# Altium PCB roneMotorBoard-v8.PcbDoc (part 2 of 2)
Units mil, origin at the board's own origin, x right, y up, seen from the top; angles counter-clockwise.
Board outline 3702 x 3936.38 mil, 2 copper layers (Top Layer, Bottom Layer); 99 components, 86 nets, 393 pads, 263 vias.
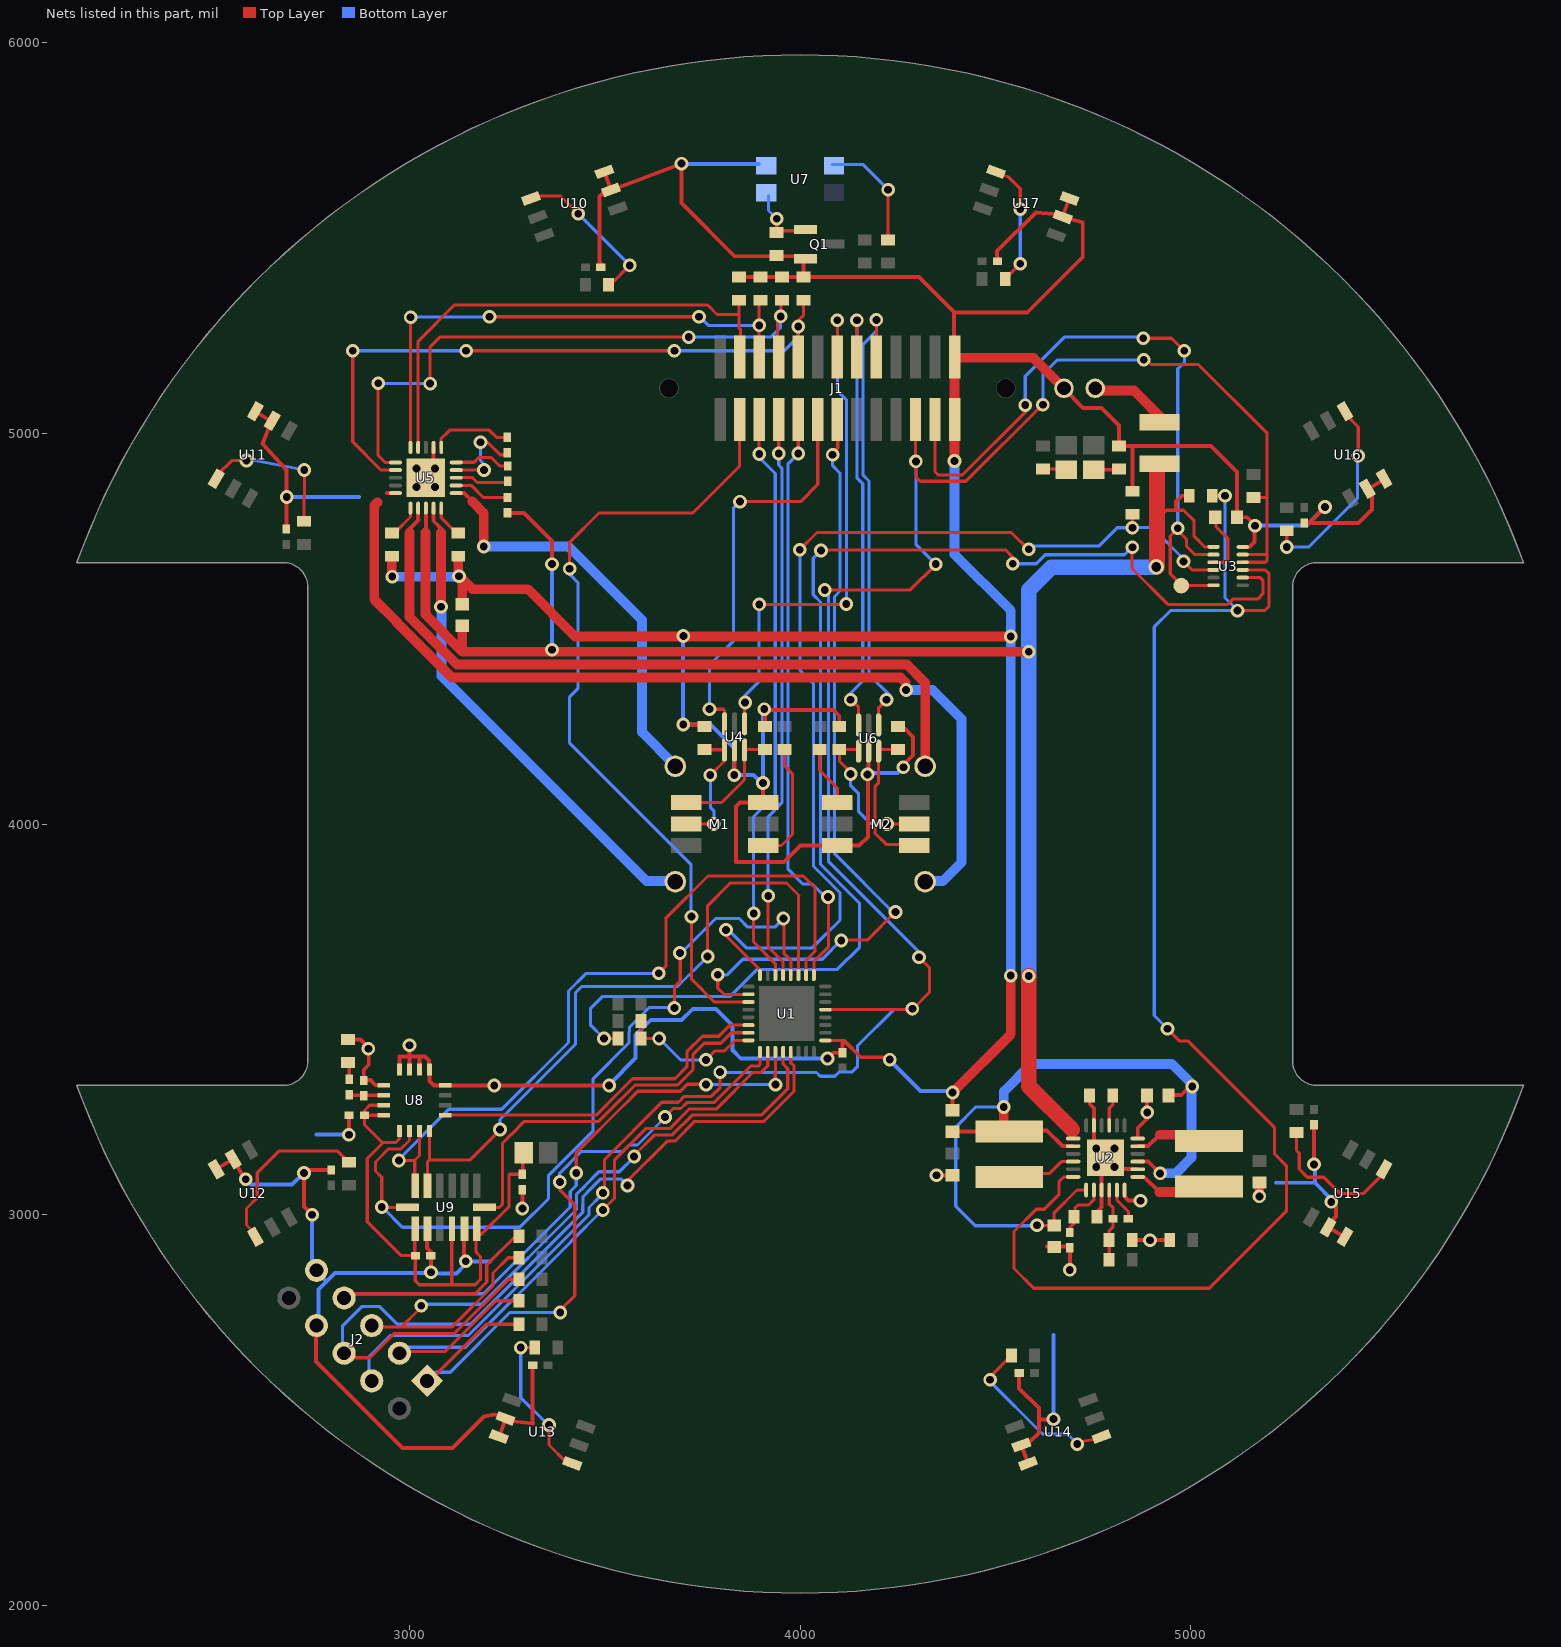
[diagram p2: the nets of this part, all layers, seen from the top]

## Via types
v1: diameter 35, hole 20, Top Layer to Bottom Layer, 230 vias
v2: diameter 89, hole 89, Top Layer to Bottom Layer, 12 vias
v3: diameter 25.98, hole 12.99, Top Layer to Bottom Layer, tented top, 9 vias
v4: diameter 35, hole 20, Top Layer to Bottom Layer, tented top, 8 vias
v5: diameter 175, hole 175, Top Layer to Bottom Layer, 2 vias
v6: diameter 915, hole 915, Top Layer to Bottom Layer, 1 vias
v7: diameter 40, hole 25, Top Layer to Bottom Layer, 1 vias

## Nets (pads, with @x,y where several pads share a name; then routed paths per layer and width w, separated by ;. In a path a pad name is that pad's centre, name@x,y a point inside that pad or via, vN(x,y) a via of type N, cw(c..) or ccw(c..) an arc to the next point about the centre after c; other vN are vias at no path point) (continued)
GND: C1.1 C2.1 C3.1 C4.1 C5.2 C6.2 C7.1 C9.2 C13.1 C14.2 C16.1 C17.1 C18.1 C19.1 C20.1 C21.1 C22.1 C23.1 C24.1 C25.1 C26.1 J1.25 J1.26 J2.8 J2.9 J3.2 M1.K M2.K Q1.2 R10.1 R11.2 R13.1 R16.2 R17.1 R19.1 R20.2 R22.1 R23.1 R24.2 R25.2 R26.2 R27.2 R28.2 R29.2 R31.1 R34.2 R35.1 U1.1 U2.3 U2.6 U2.8 U2.12 U2.17 U2.25 U3.12 U4.2 U5.2 U5.21 U6.2 U7.4 U8.8 U8.9 U8.10 U8.11 U8.12 U8.13 U9.2 U9.5 U10.5 U10.6 U11.5 U11.6 U12.5 U12.6 U13.5 U13.6 U14.5 U14.6 U15.5 U15.6 U16.5 U16.6 U17.5 U17.6 | length 17520.6
  Top Layer w8: U1.1@4067.94,3446 4107,3446
  Top Layer w10: U12.6@2505.7,3116.6 2548.38,3142.62 U12.5@2549,3143 ; U12.5@2549,3141.6 2576,3096 v1(2581,3091) ; U11.6@2606,5055 U11.5@2647.91,5030.05 ; U11.5@2643.91,5023.05 2644,5023 2624,4973 2685,4906 v1@2685,4836 ; C20.1@2685,4754.69 v1@2685,4836 ; v1(2686,4837) v1@2685,4836 ; v1(2751,3000) 2730,3021 v1(2730,3107) 2738,3115 C21.1@2800,3115 ; J2.8@2767.16,2691.42 2761,2685.26 2761,2624 2982,2403 3110,2403 3191,2484 3217,2489 U13.5@3243,2483 ; R35.1@2843,3448.53 2874.47,3448.53 2885,3438 v1@2885,3425 ; v1@2845,3214 C17.1@2845,3256 ; C14.2@2883,3343.69 2883,3371 2896,3384 v1@2896,3423 ; C14.2@2883,3345 2900,3345 2913.61,3331.39 U8.13@2934.26,3331.39 ; v1@2883,3423 v1@2885,3425 ; v1(2895,3425) v1@2885,3425 ; U8.12@2974.61,3371.74 2974.61,3405 3000.2,3405 ; U8.11@3000.2,3371.74 3000.2,3405 ; v1@3000.2,3425.2 3000.2,3405 ; U8.10@3025.8,3371.74 3025.8,3404.2 ; U9.2@3045.18,2953.94 3045.18,2914.82 3055,2905 v1(3055,2853) v1@3055,2850 ; U8.9@3050,3370 3050,3395 3040,3405 3000.2,3405 ; U8.9@3051.39,3371.74 3051.39,3342.61 3063,3331 ; U5.21@3062,4906 U5.2@3062,4964.07 ; 3064,3332 3063,3331 ; U8.8@3089,3331 3063,3331 ; U8.8@3091.35,3331 v1(3217,3331) 3400,3331 ; v1@3139.67,2885.33 v1(3144,2881) v1@3145,2880 ; v1@3140,2886 U9.5@3140,2954.61 ; U13.6@3231,2434 U13.5@3246.03,2479.2 ; U13.5@3251,2473 3316,2466 ; v1(3289,3016) C16.1@3289,3064.32 ; C22.1@3315.32,2615 3315.32,2467.68 3316,2467 ; 3401,3331 3400,3331 ; C19.1@3496,5423 3496,5428 3486,5438 3486,5606 3502.2,5622.2 U10.5@3515.97,5622.2 ; U10.6@3498.87,5669.19 U10.5@3516,5623 ; v1@3504,3331 3400,3331 ; U10.5@3526,5626 v1(3696,5690) 3696,5589 3832,5453 R34.2@3940,5453 ; v1(3700.47,4254.53) R22.1@3755,4254.53 ; v1@3832,4127 U4.2@3832,4189.54 ; R25.2@3843.53,5399.53 R26.2@3898,5399.53 R27.2@3953,5399.53 R24.2@4008,5399.53 Q1.2@4008,5441 ; M1.K@3905,4055 M1.K@3905,4055.12 ; v1(3905,4105) M1.K@3905,4055.12 ; M1.K@3905.16,4055.12 M1.K@3905,4055.12 ; R20.2@3910,4250 v1@3910,4290 ; v1@3913.5,4292 4085,4292 4100,4277 R31.1@4100,4249.53 ; R34.2@3939,5454.47 3940.47,5453 3987,5453 Q1.2@3996,5444 ; R24.2@4008,5399.53 4107.63,5399.5 ; v1(4070,3400) 4084.68,3414.68 C1.1@4108,3414.68 4108,3444 ; M2.K@4094.84,3944.88 4150.88,3944.88 4173,3967 4173,4122 4165,4130 4175,4140 U6.2@4175,4186.54 ; M2.K@4096,3945 4000.87,3945 3958.87,3903 3836,3903 3836,4045 3846.12,4055.12 M1.K@3905,4055.12 ; 4107,3445 4108,3444 ; 4107.66,5399.53 4304.47,5399.53 4394,5310 4394,5309 ; 4155,3403 4113,3445 4108,3445 4108,3444 ; 4156,3403 v1@4229,3403 ; R23.1@4248,4247 4265,4247 4289,4223 4289,4176 v1@4262,4149 ; v1@4347,3101 4390,3101 C3.1@4390,3101.44 ; C2.1@4390,3267.56 v1(4390,3313) ; 4393,5309 4394,5309 ; J1.26@4394,5235 4394,5309 ; C26.1@4504.69,5440 4504,5466 4603,5565 U17.5@4663,5560 ; C23.1@4560.31,2595 4560.31,2555.68 4611,2505 4611,2476 ; U14.5@4566.03,2410.8 4580.47,2371.44 4581,2370 U14.6@4580,2368 ; U14.5@4573,2417 4586,2417 4611,2442 4611,2476 ; 4630.84,2918.44 C4.1@4690,2918.44 ; v1(4648,2477) 4647,2476 4611,2476 ; J3.2@4675,5114 4724,5065 4771,5065 4816,5020 R17.1@4816,4967.53 5051.47,4967.53 5118,4901 C9.2@5118,4785 ; U17.6@4687,5599 U17.5@4671.97,5553.8 4723,5539 4723,5451 4581,5309 4394,5309 ; v1@4690,2862 C4.1@4690,2917.6 ; R11.2@4741,3292 4741,3283 4751.47,3272.53 U2.17@4751.47,3228.68 ; U2.17@4751.47,3228.83 4751.47,3175.69 U2.25@4781,3146.16 ; R10.1@4759,3007 4771.16,3019.16 U2.3@4771.16,3063.32 ; U2.3@4771.16,3063.48 4771.16,3136.32 U2.25@4781,3146.16 ; U2.25@4810.53,3107.47 U2.25@4810.53,3116.63 ; U2.6@4830.21,3046.79 4840.21,3036.79 v1@4871,3036.79 ; R16.2@4849.53,2935 4889,2935 v1(4895,2935) R13.1@4945.47,2935 ; R19.1@4850,4849 4850,4967 ; U2.8@4863.68,3116.63 U2.25@4810.53,3116.63 ; U2.12@4863.68,3195.37 4863.68,3221.68 4888,3246 v1@4884,3250 ; v1@4887.44,3261.56 C5.2@4887.44,3315 ; C9.2@5117.56,4785 C9.2@5118,4785 ; C9.2@5118,4780.44 C9.2@5122.56,4785 ; U3.12@5132.4,4709.21 5150.17,4709.21 5163,4722.04 5163,4754 v1@5168,4759 ; v1@5165,4763 5143,4785 C9.2@5122.56,4785 ; C25.1@5289,4771 5303,4771 v1(5343,4811) ; C25.1@5290,4770.31 5428.31,4770.31 5463,4805 5463,4847 U16.5@5460,4850 ; v1(5315,3129) C24.1@5315,3230.32 ; U15.5@5351,2968.4 U15.6@5394,2943 ; U15.5@5358,2983 5371,2996 5371,3021 v1@5362.5,3029.5 ; v1(5359,3033) v1@5362.5,3029.5 ; v1@5362,3029 v1@5362.5,3029.5 ; v1@5363,3030 v1@5362.5,3029.5 ; U16.5@5454,4858 U16.6@5493,4881 ; U2.25@4781,3146.16 U2.25@4810.53,3116.63 ; C9.2@5118,4785 C9.2@5122.56,4785
  Top Layer w25: v1@2955,4634 R28.2@2955,4685.47 ; v1@3125,4637 R29.2@3125,4685.47 ; v1@3127.5,4634.5 3161,4601 3303,4601 3424,4480 v1(4539,4480) ; C13.1@3135,4562.56 v1@3135,4625 ; v1(4390,3313) 4539,3462 v1(4539,3612) ; v1(4395,4929) J1.25@4395,5034.98 J1.26@4395,5195.02 ; J1.26@4397,5193 4597,5193 J3.2@4675,5115 ; v1(5175,3047) C7.1@5175,3082.44
  Bottom Layer w10: v1(2581,3091) 2595,3077 2700,3077 v1(2730,3107) ; v1(2686,4837) 2871,4837 ; v1(2751,3000) 2751,2866 2785,2832 ; 2762,3205 2836,3205 v1@2845,3214 ; J2.8@2767.16,2718 2767.16,2809.16 2809,2851 v1@3057,2851 ; v1@3055,2850 3120,2850 3139,2869 v1@3139,2875 ; v1@3135,2875 v1@3139,2875 ; v1@3141,2880 v1@3145,2880 ; v1@3143,2879 v1@3139,2875 ; 3206,2880 v1@3145,2880 ; v1@3513,3332 3513,3335 3579,3401 3579,3460.04 3617.46,3498.5 3663.63,3498.5 3664.13,3499 3664.87,3499 3665.37,3498.5 3696.5,3498.5 3725,3527 3784,3527 3827,3484 3827,3420 ; v1@3698,5689 U7.4@3894,5689 ; v1@3700.47,4480.47 v1(3700.47,4254.53) 3770.47,4254.53 3830,4195 3830,4130 3825,4125 v1(3831,4125) 3880,4125 v1@3902.5,4102.5 ; 3827.87,3420 3847.87,3400 v1(4070,3400) ; v1(3905,4105) v1@3905,4287 ; v1@4164,4130 4219,4130 ; 4221,4130 4249,4130 v1(4264,4145) ; v1@4231,3394 4308,3317 v1@4381,3317 ; v1(4648,2477) 4648,2692 ; v1@5163,4764 5296,4764 v1(5343,4811) ; 5217,3082 5317,3082 ; v1@5317,3128 5317,3082 ; v1@5362.5,3036.5 5317,3082 ; v1@3139,2875 3140,2875 v1@3145,2880
  Bottom Layer w25: v1(2956,4633) v1@3127,4633 ; v1(4395,4929) 4395,4690 4539,4546 v1(4539,4480) v1(4539,3612)
  other v1: 4690,2859 4871,3036 4349,3101 2845,3205 4888,3262 3511,3331 4229,3397 3000,3434 4172,4127 3908,4294 3701,4481 3127,4634 5164,4763
  other v4: 4757.38,3122.38 4804.62,3122.38 4757.38,3169.62 4804.62,3169.62 3018.38,4862.38 3065.62,4862.38 3018.38,4909.62 3065.62,4909.62
JTAG_BOTTOM_TCK: J2.1 R8.1 U1.25 | length 1812.8
  Top Layer w8: J2.1@3042,2565 3197,2720 R8.1@3280.47,2720 ; v1@3385,3085 v1(3385,3084) 3385,3064 3423,3026 3423,2793 3388,2758 v1@3397,2749 ; v1@3653,3250 3653.12,3250 3675.12,3272 3695.09,3272 3710.09,3287 3779.37,3287 3872.75,3380.37 3893.37,3380.37 3897.1,3384.1 U1.25@3897.1,3416.57
  Bottom Layer w8: J2.1@3039,2567 J2.1@3074,2567 ; J2.1@3047,2576 3068,2597 3104,2597 3257,2750 v1(3386,2750) 3389,2750 3390,2749 v1@3397,2749 ; v1@3384.5,3085.5 3384.5,3106.5 3440,3162 3546.28,3162 3562.78,3178.5 3583.5,3178.5 3654,3249 v1(3654,3250)
JTAG_BOTTOM_TDI: J2.7 R6.1 U1.27 | length 2046.4
  Top Layer w8: J2.7@2831,2778 2851,2798 3168,2798 3198,2828 3198,2872 R6.1@3273,2947 ; v1@3434,3110 3427,3117 3427,3159 3547.75,3279.75 3548.01,3279.75 3584.25,3316 3692.88,3316 3710.88,3334 3758,3334 v1(3759,3333) ; v1@3936.07,3322 U1.27@3936.47,3416.57
  Bottom Layer w8: J2.7@2826,2774 2850,2798 3189.49,2798 3411.5,3020.01 3411.5,3059.5 3427,3075 3427,3093 3421,3099 v1@3425,3099 ; v1(3759,3333) v1(3937,3333)
  other v1: 3427,3107
JTAG_BOTTOM_TDO: J2.5 R5.1 U1.28 | length 1843.9
  Top Layer w8: J2.5@2905,2713 3109.25,2713 3214,2817.75 3214,2851 3253,2890 R5.1@3280.47,2890 ; 2980.5,2713.5 3022,2755 3022,2774 v1@3034,2774 ; v1@3574.5,3151.5 3627.5,3204.5 3672.85,3204.5 3723.35,3255 3900.72,3255 3968,3322.28 3968,3374 3956.16,3385.84 U1.28@3956.16,3416.57
  Bottom Layer w8: v1@3034,2774 3037,2771 3185.12,2771 3427.5,3013.38 3427.5,3052.5 3449.5,3074.5 3449.5,3074.85 3484.65,3110 3537,3110 3575,3148 v1(3575,3149)
  other v1: 3030,2767
JTAG_BOTTOM_TEST: J2.6 R7.1 U1.29 | length 2206.9
  Top Layer w8: J2.6@2829,2634 2899,2634 2961,2696 2973,2696 ; 2970,2696 3114.88,2696 3253.88,2835 R7.1@3280.47,2835 ; v1(3558,3075) 3558,3087 3659.5,3188.5 3679.47,3188.5 3729.97,3239 3907.35,3239 3984,3315.65 3984,3381 3975.84,3389.16 U1.29@3975.84,3416.57
  Bottom Layer w8: J2.6@2829,2636 2829,2716 2878,2765 2924,2765 2969,2720 3156.75,2720 3443.5,3006.75 3443.5,3025.13 3444,3025.63 3444,3046.37 3465.5,3067.87 3465.5,3068.22 3489.28,3092 3541,3092 v1(3558,3075)
JTAG_BOTTOM_TMS: J2.3 R4.1 U1.26 | length 1699.8
  Top Layer w8: J2.3@2985,2648 2987,2650 3091.51,2650 3221.51,2780 R4.1@3280.47,2780 ; v1@3499.5,3011.5 3499.5,3017.5 3525,3043 3525,3140.72 3604.78,3220.5 3666.22,3220.5 3716.72,3271 3786,3271 3879.37,3364.37 3900,3364.37 3916.79,3381.16 U1.26@3916.79,3416.57
  Bottom Layer w8: J2.3@2969,2632 2998,2661 3143,2661 3412,2930 ; 3413,2931 v1@3495.5,3013.5
  other v1: 3495,3012
LED_IR_BEACON: J1.13 U1.18 | length 1957.7
  Top Layer w8: v1@3789,3613 3789,3580 3805,3564 U1.18@3859.79,3564 ; v1@4082,4948 4096,4962 J1.13@4096,5020 ; v1(4083,4945) v1@4084,4946 ; v1@4108.5,3703.5 4172.5,3703.5 v1(4244,3775)
  Bottom Layer w8: v1@3788,3614 v1(3789,3614) 3813,3614 3853,3654 ; 3855,3654 4056,3654 v1@4105,3703 ; v1(4083,4945) 4083,4917 4102,4898 4102,4596.28 4088,4582.28 4088,3924 v1@4241,3771
  other v1: 4105,3702
MOT0_CUR: R29.1 U5.15 | length 77.7
  Top Layer w8: U5.15@3081.37,4808.24 3081.37,4783.37 R29.1@3118.74,4746
MOT0_PWMA: J1.4 R25.1 U5.4 | length 1268
  Top Layer w8: U5.4@3022.32,4963.76 3022.32,5235.31 3115,5328 3763,5328 3787,5304 3843,5304 ; R25.1@3840,5338 3843,5335 3843,5304 ; J1.4@3842,5202.26 ccw(c3852.24,5202.26) J1.4@3845,5195.02 ; J1.4@3847,5243 3847,5266 3843,5270 3843,5304 ; J1.4@3843,5199.85 ccw(c3849.83,5199.85) J1.4@3845,5195.02 ; J1.4@3843,5199.85 ccw(c3849.83,5199.85) J1.4@3845,5195.02 ; J1.4@3843,5199.85 ccw(c3849.83,5199.85) J1.4@3845,5195.02 ; J1.4@3843,5199.85 ccw(c3849.83,5199.85) J1.4@3845,5195.02
MOT0_PWMB: J1.6 R26.1 U5.5 | length 1381.2
  Top Layer w8: U5.5@3002.63,4963.76 3002.63,5022.37 ; 3003,5022 3003,5218 v1(3003,5297) ; v1(3205,5298) v1(3741,5298) ; J1.6@3895,5195.02 v1(3895,5276) R26.1@3895,5339
  Bottom Layer w8: v1(3003,5297) 3204,5297 v1(3205,5298) ; v1(3741,5298) 3743,5298 3765,5276 v1(3895,5276) v1@3893.5,5274.5
MOT1_A: M2.M2 U5.10 | length 2371.7
  Top Layer w10: 2941.94,4846.94 U5.10@2963.56,4846.94
  Top Layer w20: v1@4270,4343 v1(4271,4343)
  Top Layer w25: 2918.5,4823.5 2910,4815 2910,4575 2967,4518 ; 2967,4516.33 3108.33,4375 4257,4375 4270,4362
  Bottom Layer w25: v1(4271,4343) 4339,4343 4413,4269 4413,3902 4365,3854 M2.M2@4323,3854
MOT1_B: M2.M1 U5.12 | length 1884.7
  Top Layer w10: 3001,4746 3001,4756 3022.97,4777.98 ; 3022,4778 U5.12@3022,4807.24
  Top Layer w25: 3001,4746 3000,4745 3000,4530 3122,4408 4273,4408 4320,4361 M2.M1@4320,4153
MOT1_CUR: R28.1 U5.11 | length 78.8
  Top Layer w8: R28.1@2965.03,4745 2965.03,4748.03 3002.63,4785.63 U5.11@3002.63,4808.24
MOT1_PWMA: J1.8 R27.1 U5.6 | length 1552.5
  Top Layer w8: v1(2920,5128) 2920,4943 2937.63,4925.37 U5.6@2964.24,4925.37 ; v1(3053,5127) 3053,5221 3078,5246 v1(3715,5246) ; v1@3942,5289 3942,5198.02 ccw(c3945,5198.02) J1.8@3945,5195.02 cw(c3945,5197.02) J1.8@3943,5197.02 ; v1(3950,5299) 3951,5298 R27.1@3951,5341
  Bottom Layer w8: v1@2920,5127 v1(3053,5127) ; v1(3715,5246) 3925,5246 3950,5271 v1(3950,5299)
MOT1_PWMB: J1.10 R24.1 U5.7 | length 1681.7
  Top Layer w8: v1@2855,5208 2855,4978 2927.32,4905.69 U5.7@2964.24,4905.69 ; v1(3145,5211) v1(3678,5211) ; J1.10@3995,5195.02 v1@3995,5263 ; v1(3995,5273) v1@4005,5273 ; 3998,5291 4008,5301 R24.1@4008,5340.47
  Bottom Layer w8: v1(2855,5211) v1(3145,5211) ; v1(3678,5211) 3959,5211 3995,5247 v1(3995,5273)
MOT_0A: M1.M2 U5.16 | length 1068.5
  Top Layer w10: U5.16@3119.07,4846.94 3140.06,4846.94 3161,4826
  Top Layer w25: 3161,4826 3161,4825 3190,4796 v1(3190,4710)
  Bottom Layer w25: v1(3190,4710) 3406.74,4710 3595,4521.74 3595,4235 M1.M2@3680,4150
MOT_0B: M1.M1 U5.14 | length 1247.3
  Top Layer w10: 3061,4776 3081,4756 ; 3062,4776 U5.14@3062,4808.56
  Top Layer w25: v1(3081,4556) 3081,4746
  Bottom Layer w25: v1@3082,4557 3082,4379 3607,3854 M1.M1@3683,3854
NetC4_2: C4.2 R10.2 U2.2 | length 143.4
  Top Layer w8: C4.2@4690,2954.69 4690,2967 4700,2977 R10.2@4700,2994 ; R10.2@4700.47,2995 R10.2@4701.17,2995 ; R10.2@4703,3000 4703,3017 4711,3025 4738,3025 4751.47,3038.47 U2.2@4751.47,3063.32
NetC8_1: C8.1 R14.2 R16.1 U2.4 | length 205.2
  Top Layer w8: R16.1@4790,2941 4790,2958 4800,2968 4800,3019 4791,3027 U2.4@4791,3056 ; U2.4@4790.84,3063.48 4791,3063.32 U2.4@4791,3048.99 ; R14.2@4791,2871 4791,2937 R16.1@4792,2938
NetC8_2: C8.2 U2.5 | length 80.5
  Top Layer w8: U2.5@4810.53,3063.32 4810.53,3037.47 4840,3008 C8.2@4840,2995
NetC9_1: C9.1 U3.3 | length 160.3
  Top Layer w8: U3.3@5057.6,4669.84 5086.84,4669.84 5095,4678 5095,4730 5064,4761 5064,4779 C9.1@5068,4783
NetC10_1: C10.1 U5.19 | length 230.2
  Top Layer w8: U5.19@3119.07,4906 v1(3191,4906) ; v1(3182,4977) 3201,4976 3232,4945 3251.69,4945 C10.1@3253,4946.31
  Bottom Layer w8: v1@3184,4913 v1(3191,4906) ; v1@3184,4975 v1(3182,4977) 3182,4930 v1@3192,4920
NetC10_2: C10.2 U5.1 | length 211.4
  Top Layer w8: U5.1@3080.68,4964.07 3080.68,4985.68 3103,5008 3204.25,5008 3223.25,4989 3248.69,4989 C10.2@3252,4985.69
NetC11_1: C11.1 U5.18 | length 138.2
  Top Layer w8: U5.18@3119.07,4886.31 3161.31,4886.31 3173.63,4874 3248.06,4874 C11.1@3251,4876.94
NetC11_2: C11.2 U5.20 | length 146.3
  Top Layer w8: U5.20@3119.07,4925.68 3165.43,4925.68 3177.75,4938 3209,4938 3230.69,4916.31 C11.2@3251.31,4916.31
NetC12_2: C12.2 U5.17 | length 144.7
  Top Layer w8: U5.17@3119.07,4866.63 3158.37,4866.63 3189.31,4835.69 C12.2@3251,4835.69
NetC15_2: C15.2 R35.2 | length 42.3
  Top Layer w8: C15.2@2846,3346.69 R35.2@2846,3389
NetD1_2: D1.2 R12.2 | length 50.5
  Top Layer w8: R12.2@4621,4908.47 D1.2@4671.53,4908.47
NetD2_2: D2.2 R17.2 | length 60.5
  Top Layer w8: D2.2@4751,4906.5 R17.2@4811.5,4906.5
NetJ3_1: J3.1 R9.2 | length 197.5
  Top Layer w25: J3.1@4771,5109 4854.15,5109 R9.2@4935,5028.15
NetL1_1: L1.1 U2.22 | length 188
  Top Layer w8: L1.1@4521,3097.75 4529.25,3106 4638.37,3106 4668.37,3136 U2.22@4693.11,3136
NetL2_1: L2.1 U2.7 | length 211.7
  Top Layer w10: U2.7@4863.68,3096.94 4880.06,3096.94 4919,3058 ; L2.1@5031.09,3058 L2.1@5051,3077.91
  Top Layer w25: 4919,3058 L2.1@5031.09,3058
NetL2_2: L2.2 U2.11 | length 158.2
  Top Layer w10: U2.11@4863.68,3175.53 4890,3175.53 ; 4890,3176 4920.91,3205 ; L2.2@5039.41,3206 L2.2@5051,3194.41
  Top Layer w25: 4920.91,3205 L2.2@4994,3205
NetM1_A: M1.A R21.1 | length 311.4
  Top Layer w8: M1.A@3906,3945 3952,3945 3980,3973 3980,4129 3960,4149 R21.1@3960,4190.47
NetM2_A: M2.A R30.1 | length 155.1
  Top Layer w8: R30.1@4050,4190.47 4050,4137 4095,4092 M2.A@4095,4054
NetQ1_1: Q1.1 R34.1 U7.3 | length 179.7
  Top Layer w8: R34.1@3940,5512 v1(3940,5549) ; R34.1@3940,5518 4010.17,5518 Q1.1@4013.57,5521.4
  Bottom Layer w8: U7.3@3919,5608 3919,5570 v1(3940,5549)
NetR2_2: R2.2 R3.2 U1.24 | length 358.3
  Top Layer w8: R3.2@3592.53,3451.47 R2.2@3592.53,3496 ; R3.2@3597,3451 v1(3639,3451) ; v1(3759,3396.36) 3782,3419.36 3806.36,3419.36 3833.1,3446.1 U1.24@3867.57,3446.1
  Bottom Layer w8: v1(3639,3451) 3693.64,3396.36 v1(3759,3396.36)
NetR11_1: R11.1 U2.15 | length 83.8
  Top Layer w8: U2.15@4790.84,3228.83 4790.84,3265.84 4790.84,3272.84 4800,3282 4800,3306 R11.1@4802,3308
NetR32_2: R32.2 U7.1 | length 299.4
  Top Layer w8: R32.2@4225,5494.53 v1(4225,5623)
  Bottom Layer w8: U7.1@4081,5688 4160,5688 v1(4225,5623)
NetR36_1: R36.1 U10.1 | length 392.3
  Top Layer w8: U10.1@3323,5607 3386.47,5607 v1(3432,5561.47) v1@3426.47,5567 ; R36.1@3514.53,5380 v1(3564,5429.47)
  Bottom Layer w8: v1(3432,5561.47) v1(3564,5429.47)
NetR37_1: R37.1 U11.1 | length 378.9
  Top Layer w8: U11.1@2511,4896 2545,4930 v1(2583,4930) ; R37.1@2726.03,4778.5 R37.1@2730,4774.53 v1(2731,4906)
  Bottom Layer w8: v1@2580,4935 2579,4935 2579.96,4934.82 2583.78,4934.09 v1(2731,4906)
NetR38_1: R38.1 U12.1 | length 443.9
  Top Layer w8: U12.1@2604,2953 2583,2974 2583,3016 2610.5,3043.5 2610.5,3107.5 2666,3163 2816.53,3163 R38.1@2845,3134.53
NetR39_1: R39.1 U13.1 | length 397.6
  Top Layer w8: v1(3285,2660) 3320,2660 R39.1@3325,2660 ; v1(3357,2462) 3357,2411 3401,2367 U13.1@3417,2367
  Bottom Layer w8: v1(3285,2660) 3285,2532 v1@3356,2461
NetR40_1: R40.1 U14.1 | length 436.9
  Top Layer w8: v1(4486,2578) 4486,2585.53 R40.1@4540.47,2640 ; v1@4711,2418 U14.1@4770,2427
  Bottom Layer w8: v1@4484,2574 4485,2574 4620,2439 4684,2439 v1@4710,2413
  other v1: 4709,2413
NetR41_1: R41.1 U15.1 | length 371.8
  Top Layer w8: R41.1@5278,3202.47 R41.1@5270,3210.47 5270,3164 5277,3157 5277,3117 5298,3096 5340,3096 5382,3054 5441,3054 5487,3100 U15.1@5487,3109
NetR42_1: R42.1 U16.1 | length 500.8
  Top Layer w8: v1@5245,4710 R42.1@5245,4750.47 ; U16.1@5397,5047 5428,5016 v1(5428,4942)
  Bottom Layer w8: v1(5245,4709) 5301.47,4709 5426,4833.53 5426,4942 v1@5427,4943
NetR43_1: R43.1 U17.1 | length 308
  Top Layer w8: U17.1@4503,5668 4534,5655 4563,5626 v1(4563,5573) ; R43.1@4524.53,5395 v1(4563,5433.47)
  Bottom Layer w8: v1@4563,5447 v1(4563,5573)
PB_OUT: R3.1 U3.8 | length 3328.6
  Top Layer w8: v1(3498,3451) R3.1@3533.47,3451 ; v1@4054.5,4701.5 4525.5,4701.5 v1@4544,4683 ; v1(4850,4708) 4845,4708 4840,4703 4849,4694 4849,4654 4941,4562 5093.28,4562 5106.78,4575.5 5170.5,4575.5 5184,4589 5184,4624 5177.53,4630.47 U3.8@5132.4,4630.47
  Bottom Layer w8: v1(3498,3451) 3463,3486 3463,3527 3495,3559 3821,3559 3890,3628 4095,3628 4152,3685 4152,3796.63 4052,3896.63 4052,4568.28 4033.5,4586.78 4033.5,4680.5 v1(4053,4700) ; v1(4544,4666) 4604,4666 4627,4689 4830,4689 v1@4849,4708 ; v1@4846,4703 4840,4703 4845,4708 v1(4850,4708)
PLLFILT: C14.1 C15.1 U8.14 | length 88.3
  Top Layer w8: C15.1@2846,3305.8 U8.14@2934.26,3305.8
POWER_BUTTON: J1.23 TP1.1 U3.2 U3.6 | length 1753.7
  Top Layer w8: J1.23@4345,5034.98 4345,4901 4353,4893 4415,4893 4576,5054 ; v1@4887,5243 4950,5243 4982,5211 v1(4983,5211) ; v1@4965,4755 4947,4737 4947,4640 4975,4612 TP1.1@4975,4610 ; v1@4972,4745.22 4988.5,4728.72 4988.5,4710.5 5009.47,4689.53 U3.2@5057.6,4689.53 ; TP1.1@4993.21,4610.79 U3.6@5057.6,4610.79
  Bottom Layer w8: v1(4576,5072) 4576,5146 4676,5246 v1@4862,5246 ; v1(4966,4757) 4966,5166 ; 4968,5166 4983,5181 v1(4983,5211)
  other v1: 4878,5243
POWER_EN: R15.1 U2.24 U3.9 | length 3574.8
  Top Layer w8: U2.24@4698.32,3096.79 4674.47,3096.79 4662,3084.31 4662,3051.37 4624.63,3014 4603.63,3014 4547,2957.37 4547,2862.63 4597.63,2812 5047,2812 5102,2867 ; v1@4939,3476 4970,3445 4991.37,3445 5214,3222.37 5214,3155.37 5244,3125.37 5244,3008.96 5102.04,2867 ; R15.1@5059.53,4840 v1(5087,4840) ; v1(5119,4546) 5188,4546 5200,4558 5200,4640 5189.84,4650.16 U3.9@5132.4,4650.16
  Bottom Layer w8: v1(4940,3476) 4906,3510 4906,4504.37 4947.63,4546 v1(5119,4546) ; v1(5087,4840) 5087,4579 v1@5119,4547
PS_HOLD: R19.2 U1.16 U3.4 | length 2673.7
  Top Layer w8: v1@3809,3715 U1.16@3897.1,3626.9 ; U1.16@3897.1,3613.43 U1.16@3897.1,3626 ; v1(3999,4702) 4043,4746 4540,4746 v1@4582,4704 ; v1@4580,4702 4581,4703 v1@4584,4700 ; v1@4850,4745 R19.2@4850,4792.47 ; v1@4981.28,4672 5003.28,4650 U3.4@5052,4650
  Bottom Layer w8: v1@3813,3732 3862,3683 4031,3683 4102,3754 4102,3824 4034,3892 4034,4359 ; v1(3999,4702) 3999,4394 4033,4360 ; v1(4585,4703) 4585,4701 4586,4700 4597,4711 4764,4711 4811,4758 4849,4758 4849,4759 4900,4759 v1@4981,4678
  other v1: 3810,3729 4981,4672 4850,4758
QEI_0A: J1.11 U4.6 | length 1017.5
  Top Layer w8: v1@3769.59,4293.59 3803.37,4293.59 3806.41,4290.55 U4.6@3806.41,4256.46 ; v1(3846,4825) 4001,4825 4045,4869 J1.11@4045,5034.98
  Bottom Layer w8: v1@3770,4296 3768,4298 3768,4407 3829,4468 3829,4808 v1(3846,4825)
  other v1: 3768,4294
QEI_0A_ANALOG: M1.E1 R22.2 U4.1 | length 335.7
  Top Layer w8: M1.E1@3708.31,4000 v1(3779,4000) ; R22.2@3755,4195 3760,4190 3805,4190 3805,4160 v1(3770,4125)
  Bottom Layer w8: v1@3770,4009 v1(3779,4000) ; v1(3770,4125) 3770,4043 3779,4034 v1@3779,4008
QEI_0B: J1.14 U4.4 | length 1414.3
  Top Layer w8: U4.4@3857.59,4256.46 v1@3857.59,4323.41 ; v1(3895,4562) v1@4129,4562 ; J1.14@4095,5195.02 v1(4095,5289)
  Bottom Layer w8: v1@3858,4310 3858,4328 3895,4365 3895,4499 ; v1(3859,4311) v1@3859,4321 ; 3895,4500 3895,4499 ; v1(3895,4562) 3895,4499 ; v1(4095,5289) 4095,5109 4118,5086 4118,4573 v1@4129,4562
  other v1: 4118,4563
QEI_0B_ANALOG: M1.E2 R20.1 U4.3 | length 293
  Top Layer w8: M1.E2@3710,4055 3799,4055 3857.59,4113.59 U4.3@3857.59,4189.54 ; 3865,4190 3865.47,4190.47 R20.1@3910,4190.47
QEI_1A: J1.16 U6.6 | length 1164.7
  Top Layer w8: v1(4129,4318) 4129,4319 4149.41,4298.59 U6.6@4149.41,4253.46 ; J1.16@4145,5195.02 v1(4145,5289)
  Bottom Layer w8: v1(4129,4318) 4129,4319 4121,4327 4160,4366 4160,4870 ; v1(4145,5289) 4145,4886 4160,4871
QEI_1A_ANALOG: M2.E1 R31.2 U6.1 | length 374.3
  Top Layer w8: R31.2@4100,4190.47 U6.1@4148.53,4190.47 ; R31.2@4101,4188 4101,4160 4129,4132 v1(4129,4128) ; v1(4222,4000) M2.E1@4285,4000
  Bottom Layer w8: v1(4129,4128) 4129,4098 4149.41,4077.59 4149.41,4031.59 4180,4001 v1@4223,4001
QEI_1B: J1.18 U6.4 | length 1213.3
  Top Layer w8: J1.18@4195,5195.02 v1(4195,5290) ; U6.4@4200.59,4253.46 4200.59,4297.59 4228,4325 4228,4328 4221,4321 v1(4221,4318)
  Bottom Layer w8: v1(4195,5290) 4195,5261.63 4161,5227.63 4161,4892.63 4176,4877.63 4176,4382 4230,4328 4228,4328 4221,4321 v1(4221,4318)
QEI_1B_ANALOG: M2.E2 R23.2 U6.3 | length 375.7
  Top Layer w8: 4200,4104 4191,4095 4191,3977 4220,3948 M2.E2@4293,3948 ; U6.3@4200,4190.47 R23.2@4250,4190.47 ; 4200.59,4105.59 U6.3@4200.59,4186.54
RESET: J1.21 J2.4 R18.1 U1.5 U3.10 U3.11 | length 5723.6
  Top Layer w8: v1@3492,3055 3499,3062 3499,3141 3646,3288 3688.46,3288 3703.46,3303 3772.75,3303 3795,3325.25 v1(3795,3365) ; v1(4063,4599) 4282,4599 4348,4665 v1(4347,4665) ; U1.5@4064.43,3524.84 4161,3524.84 ; 4163,3525 v1@4286,3525 ; v1@4285.84,3513.84 v1@4287,3515 ; v1@4287,3526 v1@4289,3526 ; v1@4290,3515 4290,3528 4331,3569 4331,3632 v1(4304,3659) ; v1@4295,4926 J1.21@4295,4996 ; v1(4296,4928) 4296,4888 4307,4877 4424,4877 4620,5073 v1(4621,5073) ; v1@4890,5190 4890,5184 4898,5176 5019,5176 5195,5000 5195,4835.47 ; U3.10@5132.4,4669.84 5189.84,4669.84 5195,4675 5195,4689.53 ; U3.11@5132.4,4689.53 5195,4689.53 ; R18.1@5160,4835.47 5195,4835.47 ; 5195.47,4835.47 5195,4835.47 ; 5195,4689.53 5195,4835.47
  Bottom Layer w8: J2.4@2897,2565 2897,2607 ; 2897,2608 2897,2607 ; v1@3491,3056 3491,3047 3488,3047 3459.5,3018.5 3459.5,3000.13 3150.37,2691 2951,2691 2897,2637 2897,2607 ; v1@3797,3364 4041.65,3364 4051.15,3354.5 4088.85,3354.5 4099.35,3365 4132,3365 4147,3380 4147,3433 4239,3525 4276,3525 v1@4287,3514 ; v1(4063,4599) 4062,4598 4072,4588 4072,3905 4301,3676 v1@4301,3655 ; v1(4296,4928) 4296,4716 v1(4347,4665) ; v1(4621,5073) 4621,5151 4657,5187 v1@4862,5187
  other v1: 3495,3056 4287,3527 4879,5188
SPI_BOTTOM_CLK: U1.12 U8.2 U9.14 | length 2062.4
  Top Layer w8: v1@2935,3019 U9.14@2984.06,3019 ; v1@2935,3028 2929,3034 2929,3096 2913,3112 2913,3135 2946.5,3168.5 2978.5,3168.5 3000.2,3190.2 U8.2@3000.2,3214.26 ; v1(3678,3529) 3678,3583 3693,3598 3693,3669 v1(3692,3670) ; 3959,3668 3976,3651 3976,3613.43 U1.12@3976,3611 ; 3959,3669 v1@3959,3760
  Bottom Layer w8: v1@2931,3019 2982,2968 3282.72,2968 3356,3041.28 3356,3100 ; 3355.5,3100.13 3470,3214.63 3470,3348 3562,3440 3562,3467.08 3563,3468.08 3563,3480 3613,3530 v1@3679,3530 ; v1@3692,3666 3784,3758 3844,3758 3866,3736 3935,3736 v1(3957,3758) v1@3958,3759
  other v1: 2929,3020
SPI_BOTTOM_MISO: U1.11 U8.4 U9.12 | length 1792.7
  Top Layer w8: U9.12@3046,3065 3046,3135 3051.39,3140.39 ; U8.4@3051.39,3214.26 3051.39,3140.39 ; v1(3231.87,3218.13) 3235.13,3220.13 3155.39,3140.39 3051.39,3140.39 ; v1(3763,3661) 3763,3791 3821,3849 3965,3849 3997,3817 ; U1.11@3995.53,3602.43 3995.53,3815
  Bottom Layer w8: v1(3231.87,3218.13) 3231.87,3243.87 3242,3254 3242.63,3254 3425,3436.37 3425,3568 3441,3584 3686,3584 v1(3763,3661)
SPI_BOTTOM_MOSI: U1.10 U8.3 U9.13 | length 1948.4
  Top Layer w8: v1@2975,3125 2989,3139 3013,3139 3025.8,3151.8 U8.3@3025.8,3214.26 ; U9.13@3013.68,3074.17 3013.68,3140 ; v1@3636,3619 3639,3619 3657,3637 3657,3760 3764,3867 4008,3867 4038,3837 4038,3674 4015.21,3651.21 U1.10@4015.21,3613.43
  Bottom Layer w8: v1@2975,3144 3101,3270 3236,3270 3407,3441 3407,3572.63 3451.37,3617 v1@3638,3617
  other v1: 2973,3139 3638,3618
SPI_BOTTOM_SEL_ACCEL: U1.23 U9.7 | length 971.2
  Top Layer w8: U9.7@3196.8,3015 3200.8,3019 3230.37,3019 3238,3026.63 3238,3183 3261,3206 ; 3261.37,3206.37 3294,3239 3484.37,3239 3541.13,3295.75 3541.38,3295.75 3577.63,3332 3686.25,3332 3726,3371.75 3726,3410.37 3754.63,3439 3797,3439 3823.79,3465.79 U1.23@3867.57,3465.79
SPI_BOTTOM_SEL_GYRO: U1.22 U8.5 | length 892.4
  Top Layer w8: U8.5@3091.74,3254.61 3092.13,3255 3477.75,3255 3534.5,3311.75 3534.75,3311.75 3571,3348 3679.63,3348 3710,3378.37 3710,3417 3750,3457 3792,3457 3820,3485 ; 3821.47,3485.47 U1.22@3867.57,3485.47
SPI_CLK: J1.9 U1.9 | length 1512.5
  Top Layer w8: v1(3995,4948) J1.9@3995,5034.98 ; U1.9@4034.9,3613.43 4034.9,3647.9 4072,3685 4072,3810 v1@4069,3813
  Bottom Layer w8: v1(3995,4948) 3969,4922 3969,3884 4006.5,3846.5 4031.22,3846.5 v1@4071.36,3806.36
  other v1: 4071,3813
SPI_MISO: J1.5 U1.14 | length 1488.6
  Top Layer w8: v1@3880.5,3768 3880.5,3698.5 3936.47,3642.53 U1.14@3936.47,3610 ; v1(3895,4947) J1.5@3895,5034.98
  Bottom Layer w8: v1@3877,3769 3880,3772 3880,4018 3936,4074 3936,4897 3895,4938 v1(3895,4947)
  other v1: 3881,3771
SPI_MOSI: J1.7 U1.13 | length 1461.6
  Top Layer w8: 3918,3685.25 3952.13,3651.13 ; 3918,3686 v1@3918,3813 ; v1(3945,4948) J1.7@3945,5034.98 ; 3952.63,3650.63 3952.13,3651.13 ; U1.13@3956.16,3610 U1.13@3956.16,3613.43 3956.16,3647.1 3952.13,3651.13
  Bottom Layer w8: v1@3916,3815 3918,3817 3918,4019 3953,4054 3953,4910.63 3945,4918.63 v1(3945,4948) ; v1@3916,3816 v1@3919,3819
  other v1: 3918,3816
SPI_SEL_CPU: J1.3 U1.19 | length 2062.8
  Top Layer w8: v1@3420,4654 3410,4664 3410,4721 3485,4796 3725,4796 3845,4916 J1.3@3845,5034.98 ; v1(3722,3763) 3722,3602.28 3779.28,3545 ; 3779.47,3544.53 U1.19@3867.57,3544.53
  Bottom Layer w8: v1@3410,4639 3431,4618 3431,4346.37 3410,4325.37 3410,4207 3721,3896 3721,3761 v1@3719.97,3759.97 ; v1(3722,3763) v1@3722.97,3763.97
  other v1: 3410,4653
VBAT: C12.1 C13.2 R9.1 R15.2 U2.19 U3.1 U5.13 | length 4666.8
  Top Layer w8: 4914,4754 4914,4780 4937,4803 4962,4803 4981,4803 5008,4776 5008,4736 5035,4709 U3.1@5053,4709
  Top Layer w10: 3042,4749 U5.13@3042,4808.24 U5.13@3042,4809 ; C12.1@3251,4796 3293,4796 3365,4724 v1(3365,4665) ; 4962,4803 4962,4825 4977,4840 R15.2@5000.47,4840
  Top Layer w25: 3041,4746 3041,4536 3135,4442 C13.2@3135,4507.44 ; 3136,4441 v1@3365,4441 ; v1@3366,4441 v1(4585,4441)
  Top Layer w40: v1(4585,3611) 4585,3329 4696,3218 ; v7@4913,4658 R9.1@4913,4906
  Bottom Layer w10: v1(3365,4446) v1(3365,4665)
  Bottom Layer w40: v1(4585,3611) v1(4585,4441) 4585,4599 4643,4657 v7@4911,4657
  other v7: 4911,4658
"VBAT +300": C2.2 C5.1 C6.1 L1.2 U2.1 U2.9 U2.20 | length 2091.3
  Top Layer w8: v1(4606,2973) 4649,2973 4649,3004 4708.48,3063.48 U2.1@4731.79,3063.48
  Top Layer w10: C2.2@4399,3213 4399.25,3213.25 L1.2@4535,3213.25 ; L1.2@4581,3215.69 L1.2@4611.31,3215.69 ; L1.2@4611.63,3216 4631,3216 4671,3176 U2.20@4698.32,3176 ; U2.9@4863.68,3136.32 4890.68,3136.32 v1(4921,3106) ; C5.1@4942.56,3315 4951.56,3306 4975,3306 v1@5001,3332
  Top Layer w25: L1.2@4521,3214.25 v1(4521,3276)
  Bottom Layer w8: v1(4521,3276) 4450,3276 4398,3224 4398,3022 4448,2972 4596,2972 4601,2967 v1@4606,2972
  Bottom Layer w25: v1(4521,3276) 4521,3316 4591,3386 4951,3386 5001,3336 5001,3146 4961,3106 v1(4921,3106)
  other v1: 5003.44,3328.44
VDDA: C16.2 C17.2 C18.2 L3.1 U8.1 U8.15 U8.16 U9.1 U9.4 U9.6 | length 1466
  Top Layer w8: C17.2@2885,3255 2885,3230 2931.5,3183.5 ; C17.2@2885,3260 2885,3267 2898.2,3280.2 U8.15@2934.26,3280.2 ; C17.2@2890.39,3254.61 U8.16@2934.26,3254.61 ; U8.1@2974.61,3214.26 2974.61,3194.61 2964.5,3184.5 2932.5,3184.5 2892,3144 2892,2982 2978,2896 3013.68,2896 U9.1@3013.68,2953.94 ; C18.2@3015,2890 3015,2831 3025,2821 3168.37,2821 3182,2834.63 3182,2893 3170,2905 3170,2950 3184,2950 3255,3021 3255,3102.37 3256.31,3103.69 C16.2@3289,3103.69 3290,3104.69 L3.1@3290,3155 ; 3108.17,2823 U9.4@3108.17,2953.94
pads on no net: J1.17 J1.20 J1.22 J1.24 J1.c1 J1.c2 J2.10 M1.NC M2.NC U1.4 U1.17 U1.20 U1.31 U1.33 U2.18 U3.5 U3.7 U5.8 U5.9 U8.6 U8.7 U9.3 U9.8 U9.9 U9.10 U9.11 U10.4 U11.4 U12.4 U13.4 U14.4 U15.4 U16.4 U17.4
copper on no net: | length 14962.3
  Top Layer w8: v1@4195,4938 4195,5034.98 ; 4245,5195.02 v1(4245,5289) ; 4295,5195.02 4295,5296 v1(4295,5288) ; 4345,5195.02 v1(4345,5288)
  Top Layer w10: 2149,3331.01 ccw(c4000,4000) 5851,3331.01 5323,3331 cw(c5323,3394) 5260,3394 5260,4606 cw(c5323,4606) 5323,4669 5851,4669 ccw(c4000,4000) 2149,4669 2677,4669 cw(c2677,4606) 2740,4606 2740,3394 cw(c2677,3394) 2677,3331 2149,3331
  Bottom Layer w8: v1@4344,5289 v1(4345,5288)
  other v1: 4195,4928
  other v2: 3255,3492 4745,3492 2907,3646 2907,3646 5093,3646 5093,3646 2907,4354 2907,4354 5093,4354 5093,4354 3255,4508 4745,4508
  other v3: 3918.76,3467.76 3966,3467.76 4013.24,3467.76 3918.76,3515 3966,3515 4013.24,3515 3918.76,3562.24 3966,3562.24 4013.24,3562.24
  other v5: 3550,2740 4450,2740
  other v6: 4000,2740

## Polygon pours and split planes (outlines as drawn)
GND on Bottom Layer "Bottom Layer-gnd" (solid, pour order 1000): 3079,3541 2844,3542 2761,3455 2759,3330 2689,3260 2688.1,3023.63 2877,2829 3206,2830 3405,3027 3405,3216
GND on Bottom Layer "Bottom Layer-gnd" (solid, pour order 1000): 4320,3413 5068,3413 5234,3249 5234,3055 5023,2806 4648,2673 4320,2670
GND on Bottom Layer "MotorGnd" (solid, pour order 1000): 2933,5072 2934,5073 3321,5073 3321,4665 3118,4462 2859,4462 2859,5000

## Keep-outs
Mechanical 1:
  circle w5: c3255,3492 r125
  circle w5: c4745,3492 r125
  circle w5: c4745,4508 r125
  circle w5: c3255,4508 r125

## Other copper
Top Layer:
  region net MOT1_B: 3013,4746 3025,4773 3016,4778 2989,4752 2989,4746
  region net MOT_0B: 3069,4747 3057,4774 3066,4779 3093,4753 3093,4747
  region net MOT_0A: 3153,4817 3148,4821 3137,4842 3137,4852 3145,4852 3170,4835
  region net MOT1_A: 2929,4817 2934,4821 2945,4842 2945,4852 2937,4852 2912,4835
  region net 5VUSB: 4689.32,3156 4643,3168 4626,3168 4626,3144 4644,3144
  region net 3.3V: 4884,3156 4916.66,3168 4925.66,3168 4925.66,3144 4919,3144
  region net VBAT: 4681,3195 4716,3195 4716,3219 4681,3217.97
  region net NetL2_2: 4889,3180 4913,3215 4935,3216 4933,3192 4890,3171
  region net "VBAT +300": 4885,3134 4909,3099 4931,3098 4929,3122 4891,3141
  region net NetL2_1: 4877,3093 4910,3049 4920,3050 4918,3070 4883,3100
  region net NetL1_1: 4670,3133 4667,3140 4642,3125 4618,3125 4618,3102 4639,3103
  region net "VBAT +300": 4673,3181 4633,3221 4618,3221 4618,3185 4643,3185 4668,3172
  region net MOT0_CUR: 3107,4752 3078,4782 3085,4786 3142,4758 3114,4755
  region net MOT1_CUR: 2972,4750 3006,4784 2999,4788 2938,4758

## Silkscreen, mask and mechanical layers (free items; w line width, h text height)
Top Overlay:
  circle w10: c3564,3753 r50
  circle w10: c4452,3760 r50
  region: 2400,4130 2250,3980 2350,3980 2350,3780 2450,3780 2450,3980 2550,3980
  text "+" at 4434,3736 h60
  text "+" at 3543,3724 h60
  text "Motor" at 3589,3074 h80
  text "Driver" at 3590,2939 h80
Mechanical 1:
  circle w1: c4000,4000 r1550
  lines w3: 2059,4000 5896,4000 ; 4000,2000 4000,6000

## Text inside footprints (layer, text, board x,y; h text height)
J2: Top Overlay "2" at 3059.14,2447.72 h50 r135; Top Overlay "1" at 3115.71,2532.57 h50 r135; Top Overlay "9" at 2733.87,2914.41 h50 r135; Top Overlay "10" at 2663.16,2843.7 h50 r135